# EAGLE board Accelerometer Test Board (EAGLE 8.2.2)
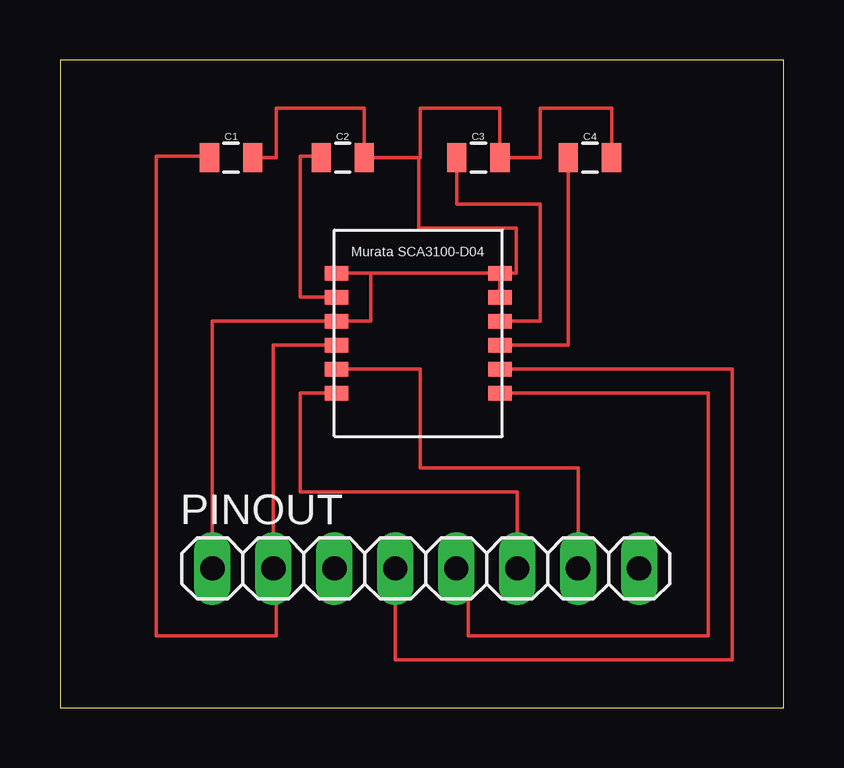
[diagram p0: board, top side]

Size 30.15 x 27.01 mm. Coordinates in mm from the lower left corner, seen from the top.
Outline: 0,0 30.15,0 30.15,27.01 0,27.01 0,0
Copper layers (1*16): Top 0.035mm / dielectric 1.5mm / Bottom 0.035mm
Design rules "default *": minimum track width 6mil, minimum drill 0.35mm, track to track 15mil, track to pad 15mil, pad to pad 15mil, via to via 15mil, smd to smd 15mil, copper to edge 40mil, drill to drill 6mil, minimum pad ring 10mil, minimum via ring 8mil, stop-mask expansion 4mil, vias tented up to drill 0mil, thermal gap 10mil

## Footprints (pad centres in the part's own frame; a part is rotated, then mirrored left to right if it is on the bottom)
0805 = smd 0.8 x 1.2: 1 -0.9,0; 2 0.9,0
1X08 = drill 1.016 long: 1 -8.89,0; 2 -6.35,0; 3 -3.81,0; 4 -1.27,0; 5 1.27,0; 6 3.81,0; 7 6.35,0; 8 8.89,0
SCA3100-D04 = smd 0.98 x 0.61: A_EXTC 0.1,-2.8; AVSS 0.1,-1.8; CSB 0.1,-5.8; D_EXTC 6.9,-3.8; DVIO 6.9,-4.8; DVSS 6.9,-2.8; EMC_GND 6.9,-1.8; MISO 0.1,-6.8; MOSI 6.9,-6.8; RESERVED 0.1,-3.8; SCK 6.9,-5.8; VDD 0.1,-4.8

## Placement (x,y rotation side)
C1  130 nF  [0805]  7.13,22.94 0 top
C2  130 nF  [0805]  11.78,22.94 0 top
C3  130 nF  [0805]  17.43,22.94 0 top
C4  130 nF  [0805]  22.08,22.94 0 top
PINOUT  [1X08]  15.24,5.81 0 top
U$1  SCA3100-D04  [SCA3100-D04]  11.43,19.92 0 top

## Library data of the parts
C1-C4 PINOUT U$1 = HyTechDevices

## Nets
GND: C1.2 C2.2 C3.2 C4.2 PINOUT.1 U$1.AVSS U$1.DVSS U$1.EMC_GND U$1.RESERVED
N$1: C2.1 U$1.A_EXTC
N$3: C3.1 U$1.D_EXTC
N$4: C4.1 U$1.DVIO
N$5: PINOUT.5 U$1.MOSI
N$6: PINOUT.4 U$1.SCK
N$7: PINOUT.7 U$1.CSB
N$8: PINOUT.6 U$1.MISO
VDD: C1.1 PINOUT.2 U$1.VDD

## Tracks (layer width: path | path; a pad name or v marks a point on that pad's centre or on a via)
GND
  Top 0.152: PINOUT.1 6.35,16.12 U$1.RESERVED 12.95,16.12 12.95,18.12 | 12.95,18.12 U$1.AVSS | 12.95,18.12 U$1.EMC_GND | C1.2 9,22.94 9,25 12.68,25 C2.2 14.95,22.94 | 14.95,22.94 15,22.94 15,25 18.33,25 C3.2 20,22.94 20,25 22.98,25 C4.2 | U$1.EMC_GND U$1.DVSS | U$1.EMC_GND 19,18.12 19,20 14.95,20 14.95,22.94
N$1
  Top 0.152: U$1.A_EXTC 10,17.12 10,23 10.88,23 C2.1
N$3
  Top 0.152: 18.33,16 U$1.D_EXTC 20,16.12 20,21 16.53,21 C3.1
N$4
  Top 0.152: 18.33,15 U$1.DVIO 21.18,15.12 C4.1
N$5
  Top 0.152: PINOUT.5 17,5.81 17,3 27,3 27,13.12 U$1.MOSI
N$6
  Top 0.152: U$1.SCK 28,14.12 28,2 13.97,2 PINOUT.4
N$7
  Top 0.152: U$1.CSB 15,14.12 15,10 21.59,10 PINOUT.7
N$8
  Top 0.152: U$1.MISO 10,13.12 10,9 19.05,9 PINOUT.6
VDD
  Top 0.152: U$1.VDD 8.89,15.12 PINOUT.2 9,5.81 9,3 4,3 4,23 6.23,23 C1.1